# Altium PCB FEU31_Part2.PcbDoc
Units mm, origin at the board's own origin, x right, y up, seen from the top; angles counter-clockwise.
Board outline 22 x 22 mm, 2 copper layers (Top Layer, Bottom Layer), stack 1.021 mm thick; 18 components, 11 nets, 44 pads, 1 vias.
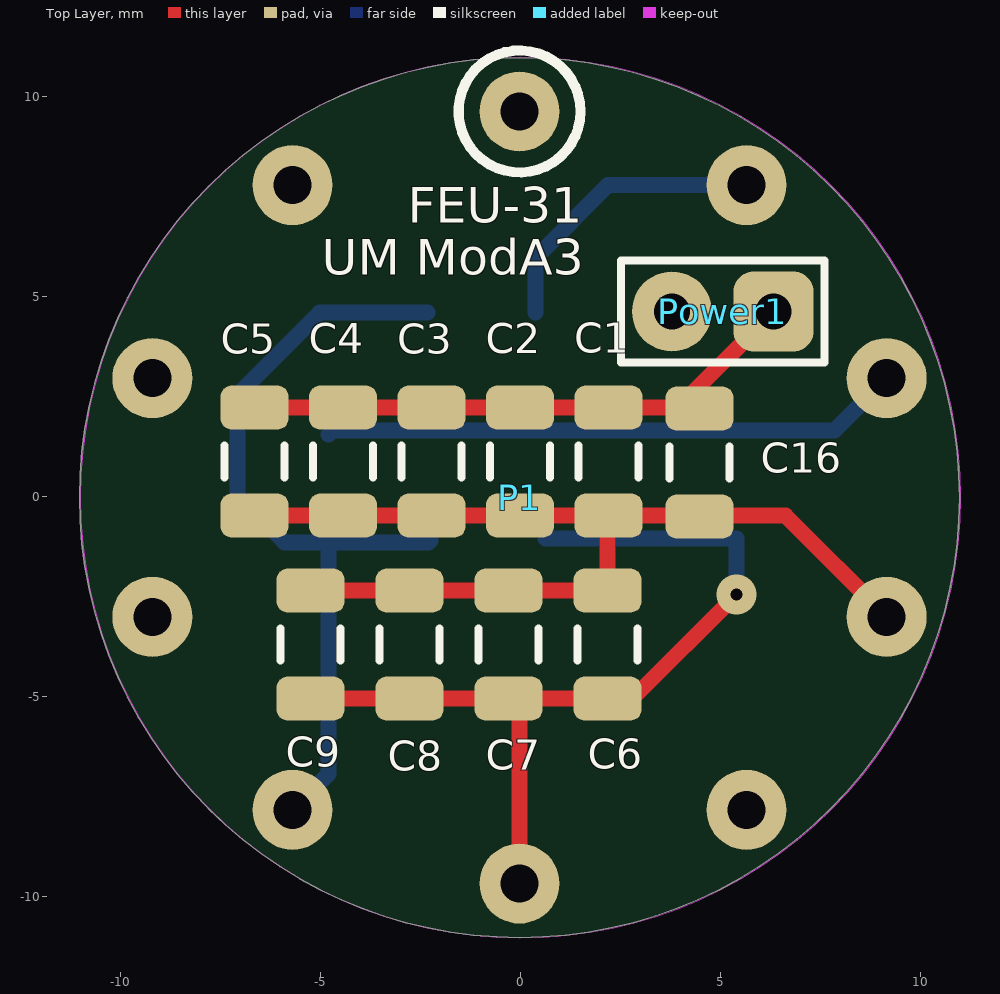
[diagram p0: Top Layer view]
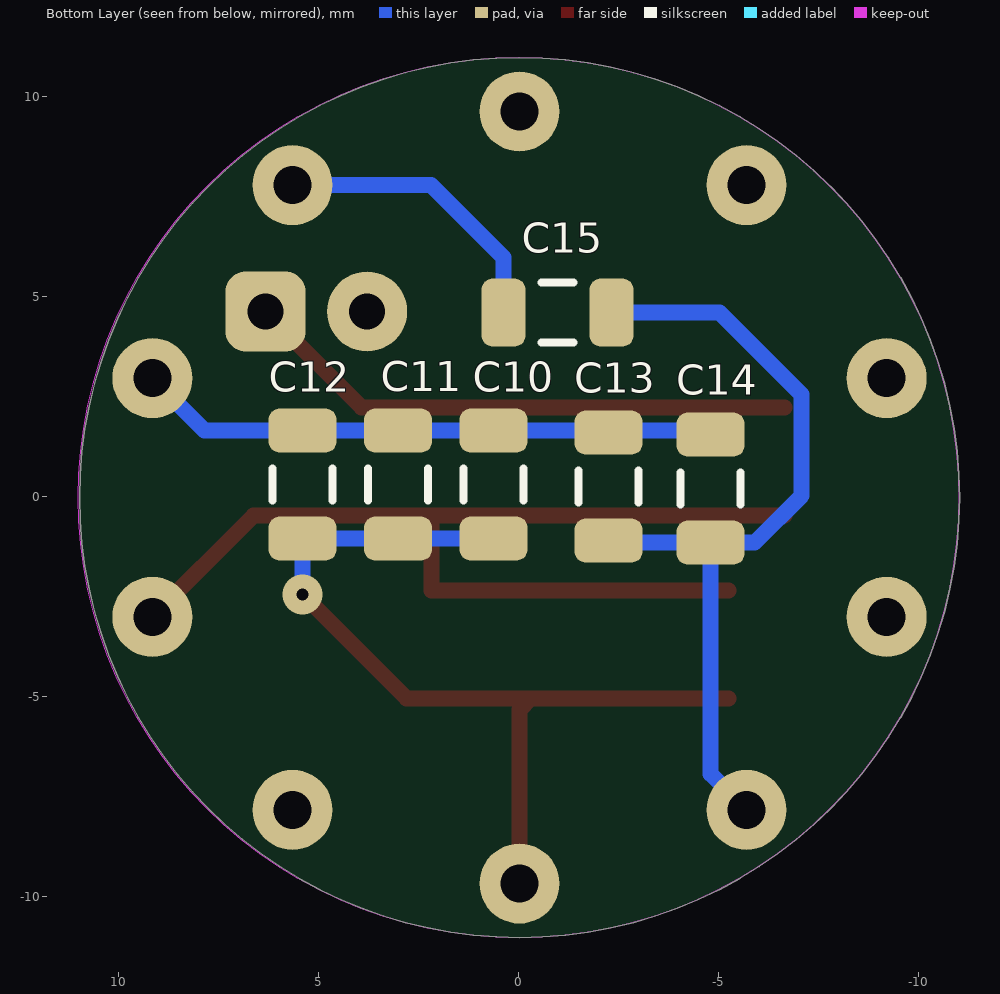
[diagram p1: Bottom Layer view, seen from below]
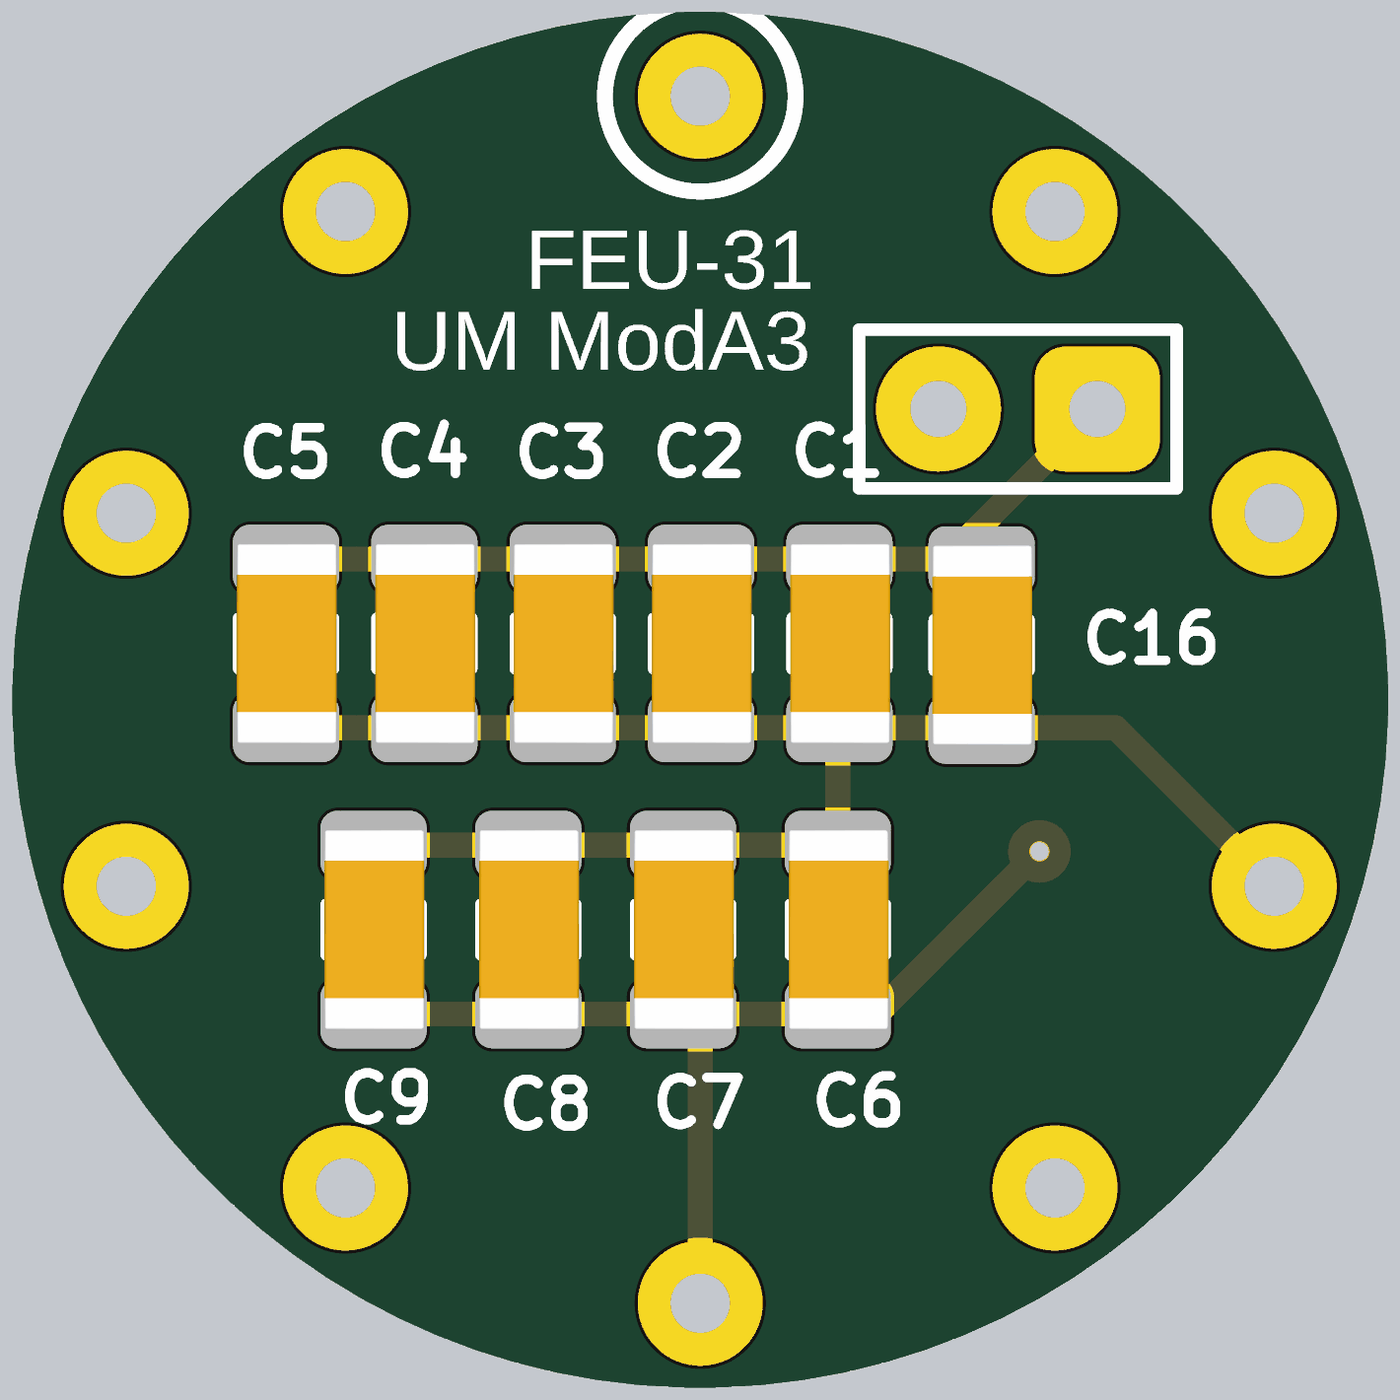
[diagram p2: 3D render of the assembled board from above, using the file's embedded part models]
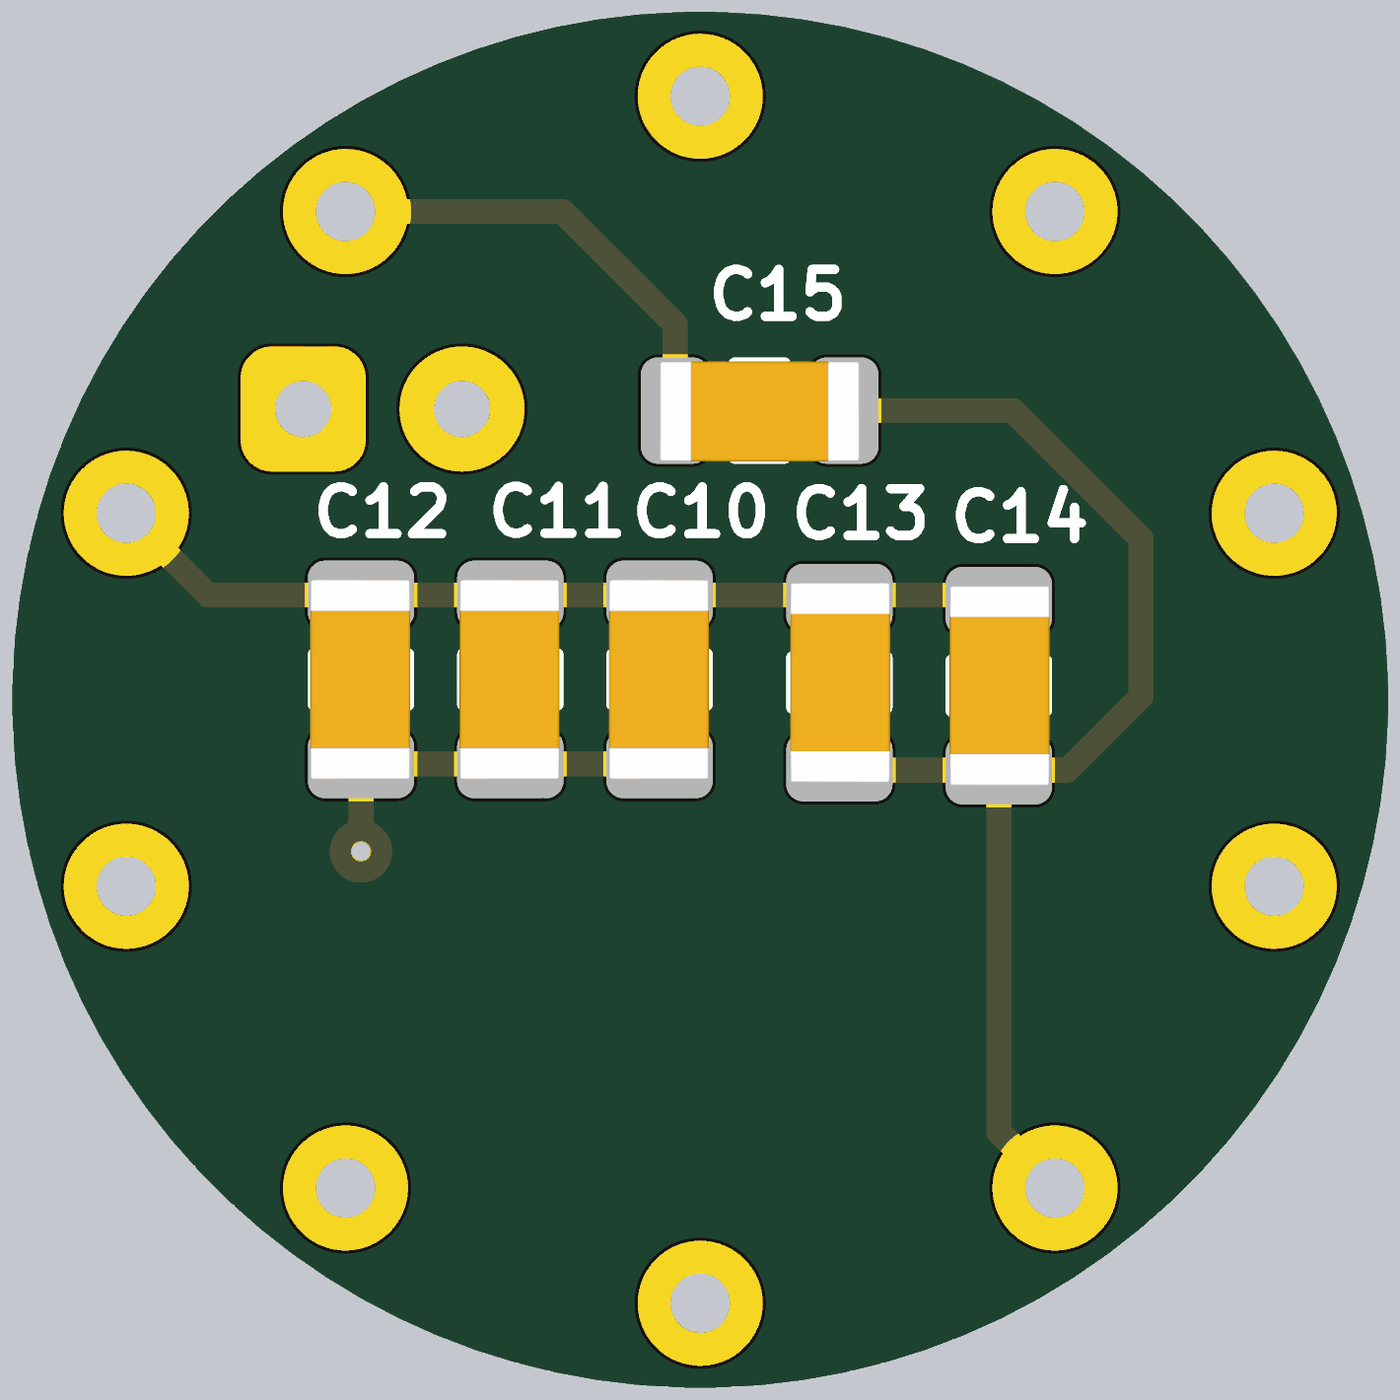
[diagram p3: 3D render of the assembled board from below, using the file's embedded part models]

## Layer stack, top to bottom
Top Solder: solder mask 0.0102, Solder Resist, Dk 3.5
Top Layer: signal copper 0.0356
Dielectric1: dielectric 0.95, FR-4, Dk 4.8
Bottom Layer: signal copper 0.0356
Bottom Solder: solder mask 0.0102, Solder Resist, Dk 3.5

## Board outline
-11.025,-0.025 ccw(c-0.025,-0.025) -0.025,-11.025 ccw(c-0.025,-0.025) 10.975,-0.025 ccw(c-0.025,-0.025) -0.025,10.975 ccw(c-0.025,-0.025)

## Design rules (kind name [scope] priority, off if disabled: settings)
Clearance [All] p1: gap=0.25
ComponentClearance [All] p1: gap=0.1 collisioncheckmode=3 verticalgap=0.254 showdistances=TRUE
HoleSize [All] p1: absolutevalues=TRUE maxlimit=2.54 minlimit=0.3 maxpercent=80.000 minpercent=20.000
HoleToHoleClearance [All] p1: gap=0.152 allowstackedmicrovias=TRUE
MinimumAnnularRing [All] p1: minimumring=0.3
MinimumSolderMaskSliver [All] p1: minsoldermaskwidth=0.152
PlaneClearance [All] p1: clearance=2
PlaneConnect [All] p1: planeconnectstyle=Relief reliefexpansion=0.457 reliefentries=4 reliefconductorwidth=0.3 reliefairgap=0.457
PolygonConnect PolygonConnect_via [IsVia] p1: connectstyle=Direct reliefconductorwidth=0.254 reliefentries=4 polygonreliefangle="90 Angle" airgapwidth=0.254
PolygonConnect [All] p2: connectstyle=Relief reliefconductorwidth=0.254 reliefentries=4 polygonreliefangle="90 Angle" airgapwidth=0.254
RoutingVias [All] p1: holewidth=0.3 width=0.62 viastyle="Through Hole" minholewidth=0.3 minwidth=0.62 maxholewidth=6 maxwidth=4
SilkToSilkClearance [All] p1: silktosilkclearance=0.152
SilkToSolderMaskClearance SilkscreenOverComponentPads [IsPad] p1: minsilkscreentomaskgap=0.1 clearancetoexposedcopper=TRUE
SolderMaskExpansion [All] p1: expansion=0.05
Width [All] p1: maxlimit=2.254 minlimit=0.4 preferedwidth=0.4
22 further rules are at their usual default settings.

## Components (designator, comment, footprint, x,y, rotation, side; value= is the part's Value field where it differs from the comment)
C1 "100nF" C1206 2.2,0.875 r90 top
C2 "100nF" C1206 -0.013,0.875 r90 top
C3 "100nF" C1206 -2.225,0.875 r90 top
C4 "100nF" C1206 -4.438,0.875 r90 top
C5 "100nF" C1206 -6.65,0.875 r90 top
C6 "100nF" C1206 2.175,-3.7 r90 top
C7 "100nF" C1206 -0.3,-3.7 r90 top
C8 "100nF" C1206 -2.775,-3.7 r90 top
C9 "100nF" C1206 -5.25,-3.7 r90 top
C10 "100nF" C1206 0.625,0.3 r270 bottom
C11 "100nF" C1206 3.012,0.3 r270 bottom
C12 "100nF" C1206 5.4,0.3 r270 bottom
C13 "100nF" C1206 -2.25,0.25 r90 bottom
C14 "100nF" C1206 -4.8,0.2 r90 bottom
C15 "100nF" C1206 -0.975,4.6 r180 bottom
C16 "100nF" C1206 4.475,0.85 r90 top
P1 "Header 5X2" ФЭУ-31 -0.025,-0.025 r90 top locked
Power1 "Header 2" HDR1X2 6.325,4.625 r180 top locked

## Footprints (in the part's own frame and the unit in brackets; to place one, negate y for a bottom-side part, rotate by r counter-clockwise, add the part's x,y. Pads: shape width x height; smd on the part's side, far side on the other; paste and mask are expansions set on the pad)
C1206 [mm] "Chip Capacitor, Body 3.2x1.6mm, IPC High Density"
  rrect50% 1.1x1.7 smd: 1(-1.35,0) 2(1.35,0)
  silkscreen extent -0.4,-0.75 0.4,0.75, body extent -1.6,-0.81 1.6,0.79, height 1.6
HDR1X2 [mm] "Connector; Header; 2 Position"
  rrect50% 2x2 hole 0.9: 1(0,0)
  round 2 hole 0.9: 2(2.54,0)
  silkscreen extent -1.27,-1.27 3.81,1.27
ФЭУ-31 [mm]
  round 2 hole 0.95: 1(9.652,0) 2(7.809,-5.673) 3(2.983,-9.18) 4(-2.983,-9.18) 5(-7.809,-5.673) 6(-9.652,0) 7(-7.809,5.673) 8(-2.983,9.18) 9(2.983,9.18) 10(7.809,5.673)
  silkscreen extent 8.13,-1.52 11.18,1.52

## Part data
C1 C2 C3 C4 C5 C6 C7 C8 C9 C10 C11 C12 C13 C14 C15 C16: library part "Cap Semi", "Capacitor (Semiconductor SIM Model)"
P1: "Header, 5-Pin, Dual row"
Power1: "Header, 2-Pin"

## Via types
v1: diameter 1, hole 0.3, Top Layer to Bottom Layer, tented both sides, 1 vias

## Nets (pads, with @x,y where several pads share a name; then routed paths per layer and width w, separated by ;. In a path a pad name is that pad's centre, name@x,y a point inside that pad or via, vN(x,y) a via of type N, cw(c..) or ccw(c..) an arc to the next point about the centre after c; other vN are vias at no path point)
ANODE: P1.5
DINODE1: P1.9
DINODE2: P1.1
DINODE3: P1.8
DINODE4: C15.1 P1.2 | length 7.4
  Bottom Layer w0.4: C15.1 0.375,5.975 2.184,7.784 P1.2
DINODE5: C13.1 C14.1 C15.2 P1.7 | length 20.5
  Bottom Layer w0.4: P1.7 -4.8,-6.935 C14.1 ; C15.2 -5.025,4.6 -7.075,2.55 -7.075,0.025 -5.9,-1.15 C14.1 ; C13.1 -2.3,-1.15 C14.1
DINODE6: C10.1 C11.1 C12.1 C13.2 C14.2 P1.3 | length 14.5
  Bottom Layer w0.4: C14.2 -4.7,1.65 C10.1 C11.1 C12.1 7.847,1.65 P1.3
DINODE7: C6.1 C7.1 C8.1 C9.1 C10.2 C11.2 C12.2 P1.6 | length 22.6
  Top Layer w0.4: C9.1 C8.1 C7.1 ; P1.6 -0.025,-5.325 C7.1 ; v1(5.4,-2.45) 2.8,-5.05 C6.1 C7.1
  Bottom Layer w0.4: C10.2 C11.2 C12.2 v1(5.4,-2.45)
DINODE8: C1.1 C2.1 C3.1 C4.1 C5.1 C6.2 C7.2 C8.2 C9.2 C16.1 P1.4 | length 26.2
  Top Layer w0.4: C5.1 C4.1 C3.1 C2.1 C1.1 ; C9.2 C8.2 C7.2 C6.2 2.175,-0.5 C1.1 ; P1.4 6.622,-0.475 C1.1
FOTOKAT: P1.10
GND: C1.2 C2.2 C3.2 C4.2 C5.2 C16.2 Power1.1 | length 14
  Top Layer w0.4: C5.2 C4.2 C3.2 C2.2 C1.2 3.925,2.225 Power1.1
pads on no net: Power1.2

## Keep-outs
Keep-Out Layer:
  circle w0.01: c0,-0.025 r11.008

## Silkscreen, mask and mechanical layers (free items; w line width, h text height)
Top Overlay:
  text "FEU-31" at -2.825,6.55 h1.52
  text "UM ModA3" at -4.975,5.25 h1.52